# EAGLE board OSU Nono Keyboard (EAGLE 7.7.0)
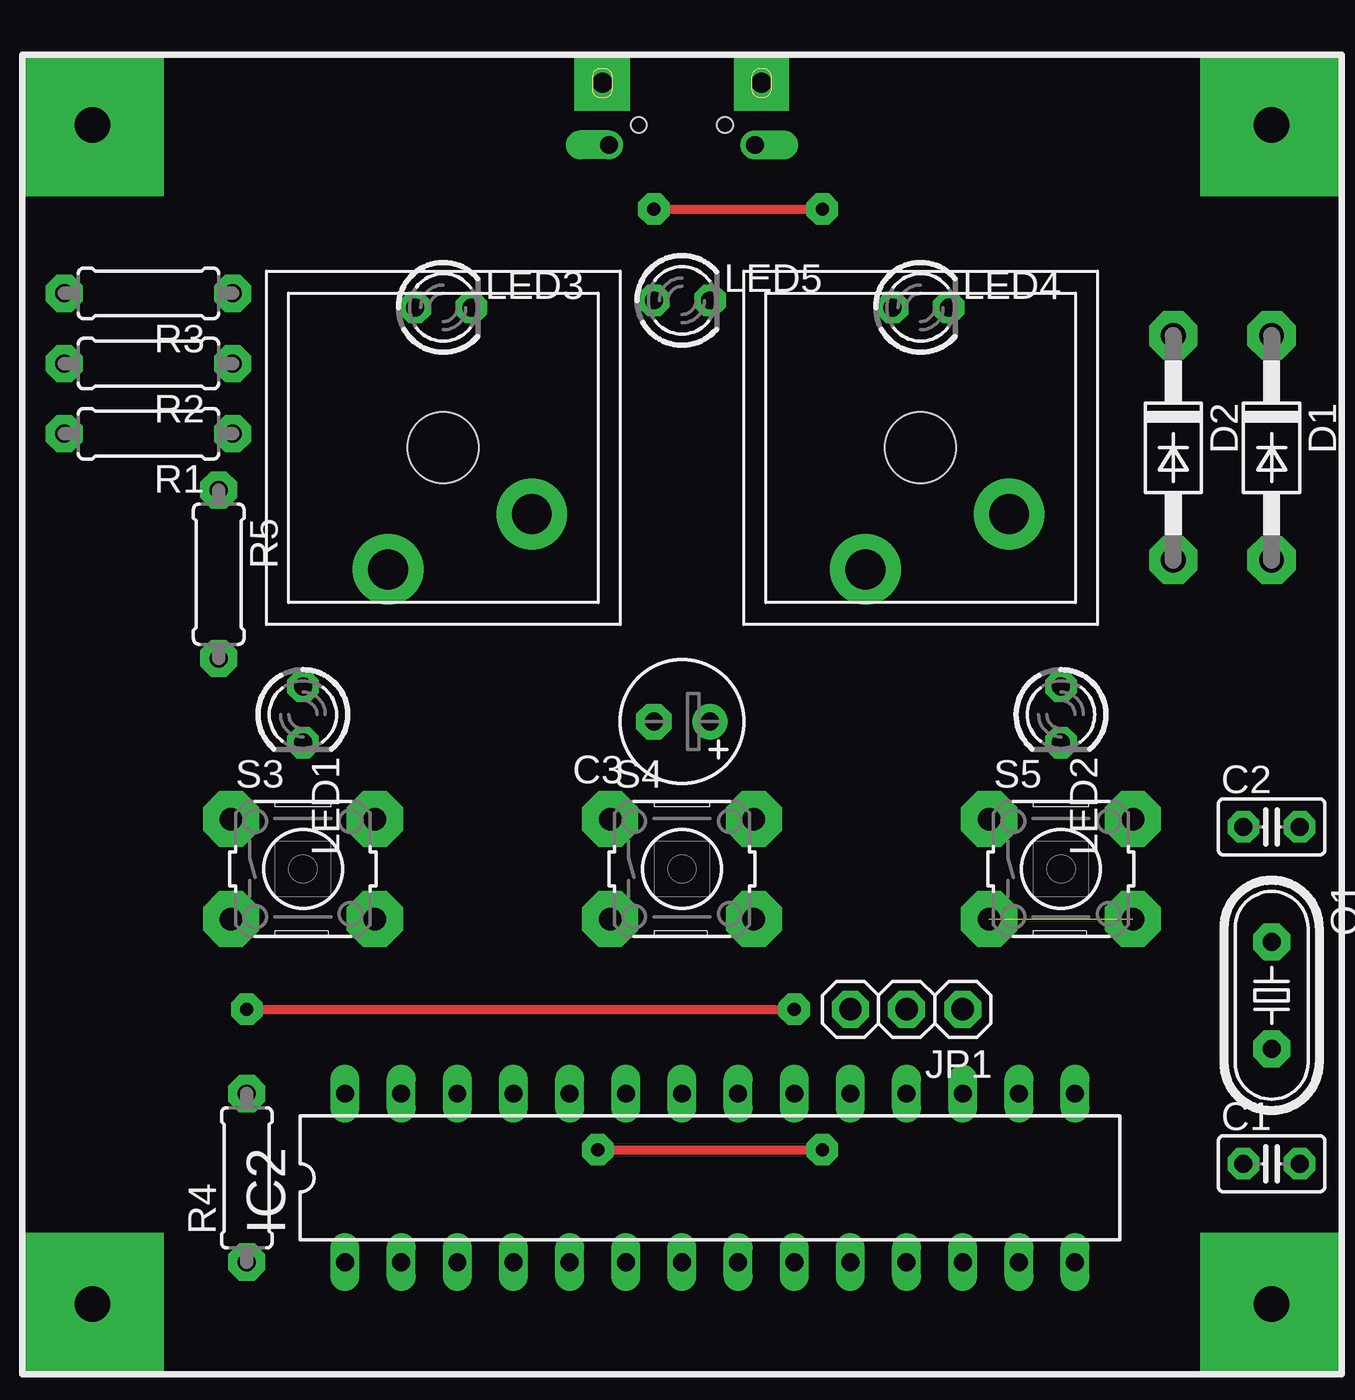
[diagram p0: board, top side]
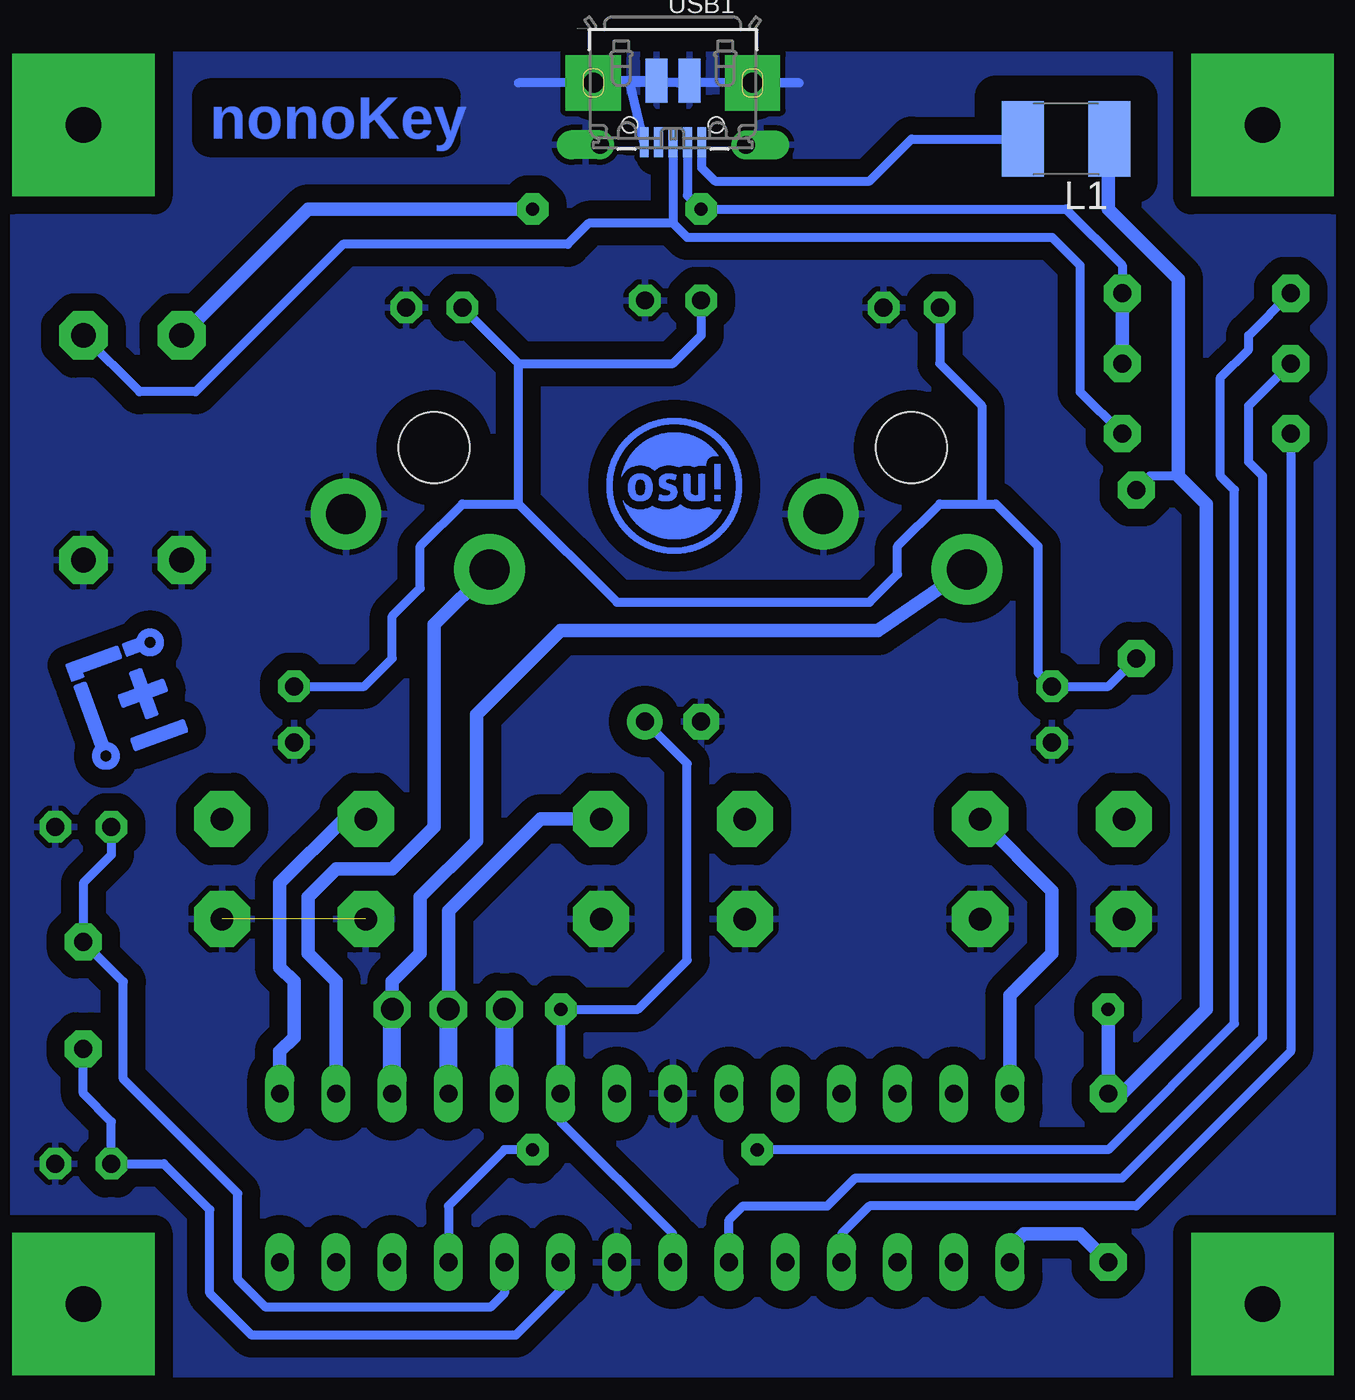
[diagram p1: board, bottom side, seen from below]

Size 8.1 x 1.31 mm. Coordinates in mm from the lower left corner, seen from the top.
Copper layers (1*16): Top 0.035mm / dielectric 1.5mm / Bottom 0.035mm
Design rules "default": minimum track width 10mil, minimum drill 24mil, track to track 8mil, track to pad 8mil, pad to pad 8mil, via to via 8mil, smd to smd 8mil, copper to edge 40mil, drill to drill 8mil, minimum pad ring 10mil, minimum via ring 8mil, stop-mask expansion 4mil, vias tented up to drill 0mil, thermal gap 10mil
bRestrict: area -16.9,-3.8 to -10.6,0

## Footprints (pad centres in the part's own frame; a part is rotated, then mirrored left to right if it is on the bottom)
C025-025X050 = drill 0.813 pad 1.422 octagon: 1 -1.27,0; 2 1.27,0
E2,5-6 = drill 0.813 pad 1.6: + -1.27,0 | drill 0.813 pad 1.6 octagon: - 1.27,0
D40-10 = drill 1.118 pad 2.184 octagon: A 5.08,0; C -5.08,0
DIL28-3 = drill 0.813 long: 1 -16.51,-3.81; 2 -13.97,-3.81; 3 -11.43,-3.81; 4 -8.89,-3.81; 5 -6.35,-3.81; 6 -3.81,-3.81; 7 -1.27,-3.81; 8 1.27,-3.81; 9 3.81,-3.81; 10 6.35,-3.81; 11 8.89,-3.81; 12 11.43,-3.81; 13 13.97,-3.81; 14 16.51,-3.81; 15 16.51,3.81; 16 13.97,3.81; 17 11.43,3.81; 18 8.89,3.81; 19 6.35,3.81; 20 3.81,3.81; 21 1.27,3.81; 22 -1.27,3.81; 23 -3.81,3.81; 24 -6.35,3.81; 25 -8.89,3.81; 26 -11.43,3.81; 27 -13.97,3.81; 28 -16.51,3.81
1X03-O = drill 1.016 pad 1.676 octagon: 1 -2.54,0; 2 0,0; 3 2.54,0
L1812 = smd 1.9 x 3.4: 1 -1.95,0; 2 1.95,0
LED3MM = drill 0.813 pad 1.422 octagon: A -1.27,0; K 1.27,0
HC49S = drill 0.813 pad 1.676 octagon: 1 -2.413,0; 2 2.413,0
0207/7 = drill 0.813 pad 1.676 octagon: 1 -3.81,0; 2 3.81,0
MECHA-KEYBOARD = drill 1.8 pad 3.2: 1 -2.5,-5.5; 2 4,-3 | hole 3.2: 0,0
TACT-6X6MM-OCTAGON = drill 1.016 pad 2.54 octagon: 1 -3.251,2.261; 2 3.251,2.261; 3 -3.251,-2.261; 4 3.251,-2.261
MICRO-USB-SMD = smd 1 x 2: BASE@1 -0.75,-0.73; BASE@2 0.75,-0.73 | smd 0.4 x 1.35: D+ 0,2.045; D- -0.65,2.045; GND 1.3,2.045; ID 0.65,2.045; VBUS -1.3,2.045 | drill 0.8 pad 1.2 offset: SPRT@1 -3.3,2.17; SPRT@2 3.3,2.17 | drill 0.9 pad 2.5 square: SPRT@3 -3.6,-0.63; SPRT@4 3.6,-0.63 | hole 0.7: -1.95,1.27; 1.95,1.27

## Placement (x,y rotation side)
C1  22pf  [C025-025X050]  30.72,-48.24 0 top  (outside the outline)
C2  22pf  [C025-025X050]  30.72,-33 0 top  (outside the outline)
C3  [E2,5-6]  4.05,-28.23 180 top  (outside the outline)
D1  3,6V  [D40-10]  30.72,-15.85 270 top  (outside the outline)
D2  3,6V  [D40-10]  26.28,-15.85 270 top  (outside the outline)
IC2  MEGA8-P-DIL  [DIL28-3]  5.32,-48.87 0 top  (outside the outline)
JP1  [1X03-O]  14.21,-41.25 180 top  (outside the outline)
L1  RFUSE  [L1812]  -13.73,-1.88 180 bottom  (outside the outline)
LED1  RGB  [LED3MM]  -13.09,-27.92 270 top  (outside the outline)
LED2  RGB  [LED3MM]  21.2,-27.92 270 top  (outside the outline)
LED3  RGB  [LED3MM]  -6.74,-9.5 0 top  (outside the outline)
LED4  RGB  [LED3MM]  14.85,-9.5 0 top  (outside the outline)
LED5  RGB  [LED3MM]  4.05,-9.18 0 top  (outside the outline)
Q1  16MHz  [HC49S]  30.72,-40.62 270 top  (outside the outline)
R1  68  [0207/7]  -20.08,-15.22 180 top  (outside the outline)
R2  68  [0207/7]  -20.08,-12.04 180 top  (outside the outline)
R3  2K2  [0207/7]  -20.08,-8.87 180 top  (outside the outline)
R4  68  [0207/7]  -15.63,-48.87 90 top  (outside the outline)
R5  330  [0207/7]  -16.9,-21.57 270 top  (outside the outline)
S1  L  [MECHA-KEYBOARD]  -6.74,-15.85 0 top  (outside the outline)
S2  R  [MECHA-KEYBOARD]  14.85,-15.85 0 top  (outside the outline)
S3  1  [TACT-6X6MM-OCTAGON]  -13.09,-34.9 0 top  (outside the outline)
S4  2  [TACT-6X6MM-OCTAGON]  4.05,-34.9 0 top  (outside the outline)
S5  3  [TACT-6X6MM-OCTAGON]  21.2,-34.9 0 top  (outside the outline)
USB1  MICRO-USB  [MICRO-USB-SMD]  4.05,0.02 180 bottom

## Library data of the parts
C1-C3 L1 R1-R5 = FansElectronics-RCL
D1 D2 = FansElectronics-Diode
IC2 = FansElectronics-Atmel; OC_FARNELL: unknown; OC_NEWARK: unknown
JP1 = FansElectronics-Header
LED1-LED5 = FansElectronics-LED
Q1 = FansElectronics-Crystal
S1-S5 = FansElectronics-Switch
USB1 = FansElectronics-Con-USB

## Nets
+5V: C3.+ IC2.7 IC2.20 L1.1 R4.2 R5.1
B1: IC2.28 S3.2
B2: IC2.18 JP1.2 S4.2
B3: IC2.15 S5.1
BL: IC2.17 JP1.1 S1.1
BR: IC2.16 S2.1
D2: IC2.4 R1.2
D4: IC2.6 R2.2
D5: IC2.11 R3.2
GND: C1.2 C2.2 C3.- D1.A D2.A IC2.8 IC2.22 LED1.K LED2.K LED3.K LED4.K LED5.K S1.2 S2.2 S3.3 S3.4 S4.3 S4.4 S5.3 S5.4 USB1.BASE@1 USB1.BASE@2 USB1.GND USB1.SPRT@1 USB1.SPRT@2 USB1.SPRT@3 USB1.SPRT@4
N$5: L1.2 USB1.VBUS
N$6: D1.C R1.1 USB1.D+
N$7: D2.C R2.1 R3.1 USB1.D-
N$8: C2.1 IC2.10 Q1.1
N$9: C1.1 IC2.9 Q1.2
N$10: IC2.19 JP1.3
N$11: LED1.A LED2.A LED3.A LED4.A LED5.A R5.2
RST: IC2.1 R4.1

## Tracks (layer width: path | path; a pad name or v marks a point on that pad's centre or on a via)
+5V  (via drill 0.6 pad 1.42)
  Top 0.406: v-15.63,-41.25 v9.13,-41.25
  Bottom 0.406: -20.08,-41.25 -20.08,-40.62 | -15.63,-1.93 L1.1 | IC2.7 4.05,-51.41 9.13,-46.33 IC2.20 v9.13,-41.25 5.64,-41.25 3.42,-39.03 3.42,-30.14 C3.+ | -18.81,-17.12 -17.54,-17.12 R5.1
  Bottom 0.61: -15.63,-1.93 -15.63,-5.06 -18.81,-8.23 -18.81,-17.12 -20.08,-18.39 -20.08,-41.25 -16.27,-45.06 R4.2 v-15.63,-41.25
B1
  Bottom 0.61: IC2.28 -11.19,-40.62 -13.09,-38.71 -13.09,-35.89 S3.2
B2
  Bottom 0.61: S4.2 10.04,-32.64 14.21,-36.81 JP1.2
  Bottom 0.813: IC2.18 JP1.2
B3
  Bottom 0.61: IC2.15 21.83,-43.16 21.2,-42.52 21.2,-39.98 21.83,-39.35 21.83,-35.54 18.93,-32.64 S5.1
BL
  Bottom 0.61: JP1.1 16.75,-39.98 15.48,-38.71 15.48,-36.17 12.94,-33.63 12.94,-27.92 9.13,-24.11 -5.22,-24.11 S1.1
  Bottom 0.813: IC2.17 JP1.1
BR
  Bottom 0.61: IC2.16 19.29,-39.98 20.56,-38.71 20.56,-36.17 19.29,-34.9 16.75,-34.9 14.85,-33 14.85,-23.85 S2.1
D2
  Bottom 0.406: R1.2 -23.89,-43.16 -16.9,-50.14 -4.84,-50.14 -3.57,-51.41 IC2.4
D4
  Bottom 0.406: IC2.6 1.51,-50.78 0.88,-50.14 -2.93,-50.14 -4.2,-48.87 -16.27,-48.87 -22.62,-42.52 -22.62,-17.12 -21.98,-16.49 -21.98,-13.95 R2.2
D5  (via drill 0.6 pad 1.42)
  Top 0.406: v0.24,-47.6 v10.4,-47.6
  Bottom 0.406: v0.24,-47.6 -15.63,-47.6 -21.35,-41.89 -21.35,-17.76 -20.71,-17.12 -20.71,-12.68 -21.98,-11.41 -21.98,-10.77 R3.2 | v10.4,-47.6 11.67,-47.6 14.21,-50.14 IC2.11
GND  (1 unrouted)
  Bottom 0.406: USB1.BASE@2 8.19,0.75 USB1.SPRT@4 | USB1.BASE@1 3.84,0.65 USB1.SPRT@3 -1.66,0.65 -1.66,0.66 5.96,0.66 | 5.96,0.66 11.04,0.66 | USB1.GND 5.99,0.63 5.96,0.66
  pour Bottom (isolate 0.813): -25.79,1.93 33.9,1.93 33.9,-57.76 -25.79,-57.76
N$1  (via drill 1.6 pad 6.45)
  other vias: -22.62,-1.25
N$2  (via drill 1.6 pad 6.45)
  other vias: 30.72,-1.25
N$3  (via drill 1.6 pad 6.45)
  other vias: -22.62,-54.59
N$4  (via drill 1.6 pad 6.45)
  other vias: 30.72,-54.59
N$5
  Bottom 0.406: USB1.VBUS 2.75,-3.18 2.15,-3.79 -4.84,-3.79 -6.74,-1.88 L1.2
N$6
  Bottom 0.406: USB1.D+ 4.05,-5.69 | 4.05,-5.69 3.42,-6.33 -13.09,-6.33 -14.36,-7.6 -14.36,-13.31 R1.1 | 4.05,-5.69 7.86,-5.69 8.81,-6.64 18.97,-6.64 25.64,-13.31 28.18,-13.31 D1.C
N$7  (via drill 0.6 pad 1.42)
  Top 0.406: v2.78,-5.06 v10.4,-5.06
  Bottom 0.406: USB1.D- 3.4,-4.44 v2.78,-5.06 -13.73,-5.06 -16.27,-7.6 R3.1
  Bottom 0.61: R2.1 R3.1 | v10.4,-5.06 20.56,-5.06 D2.C
N$8
  Bottom 0.406: IC2.10 11.67,-54.09 12.31,-54.72 22.47,-54.72 23.74,-53.45 23.74,-49.58 28.92,-44.4 28.92,-40.01 Q1.1 30.72,-35.54 29.45,-34.27 C2.1
N$9
  Bottom 0.406: IC2.9 9.13,-53.95 11.17,-55.99 23.1,-55.99 25.01,-54.09 25.01,-50.31 27.08,-48.24 C1.1 29.45,-46.33 30.72,-45.06 Q1.2
N$10
  Bottom 0.813: IC2.19 JP1.3
N$11
  Bottom 0.406: R5.2 -15.63,-26.65 LED1.A -12.46,-26.01 -12.46,-20.3 -10.55,-18.39 -9.92,-18.39 | LED2.A 18.02,-26.65 16.75,-25.38 16.75,-23.47 15.48,-22.2 15.48,-20.3 13.58,-18.39 11.04,-18.39 | 11.04,-18.39 6.59,-22.84 -4.84,-22.84 -6.11,-21.57 -6.11,-20.3 -8.01,-18.39 -9.92,-18.39 | LED3.A -8.01,-12.04 -9.92,-13.95 -9.92,-18.39 | 11.04,-18.39 11.04,-12.04 | 11.04,-12.04 LED4.A | LED5.A 2.78,-10.77 4.05,-12.04 11.04,-12.04
RST
  Bottom 0.61: R4.1 -14.36,-51.41 -11.82,-51.41 -11.19,-52.05 IC2.1
(copper drawn outside any net)
  shapes: Bottom area x7738

## Text on the board
Bottom: nonoKey